# EAGLE board Iridium_9603_Beacon_V3_Paste_Mask_All (EAGLE 7.6.0)
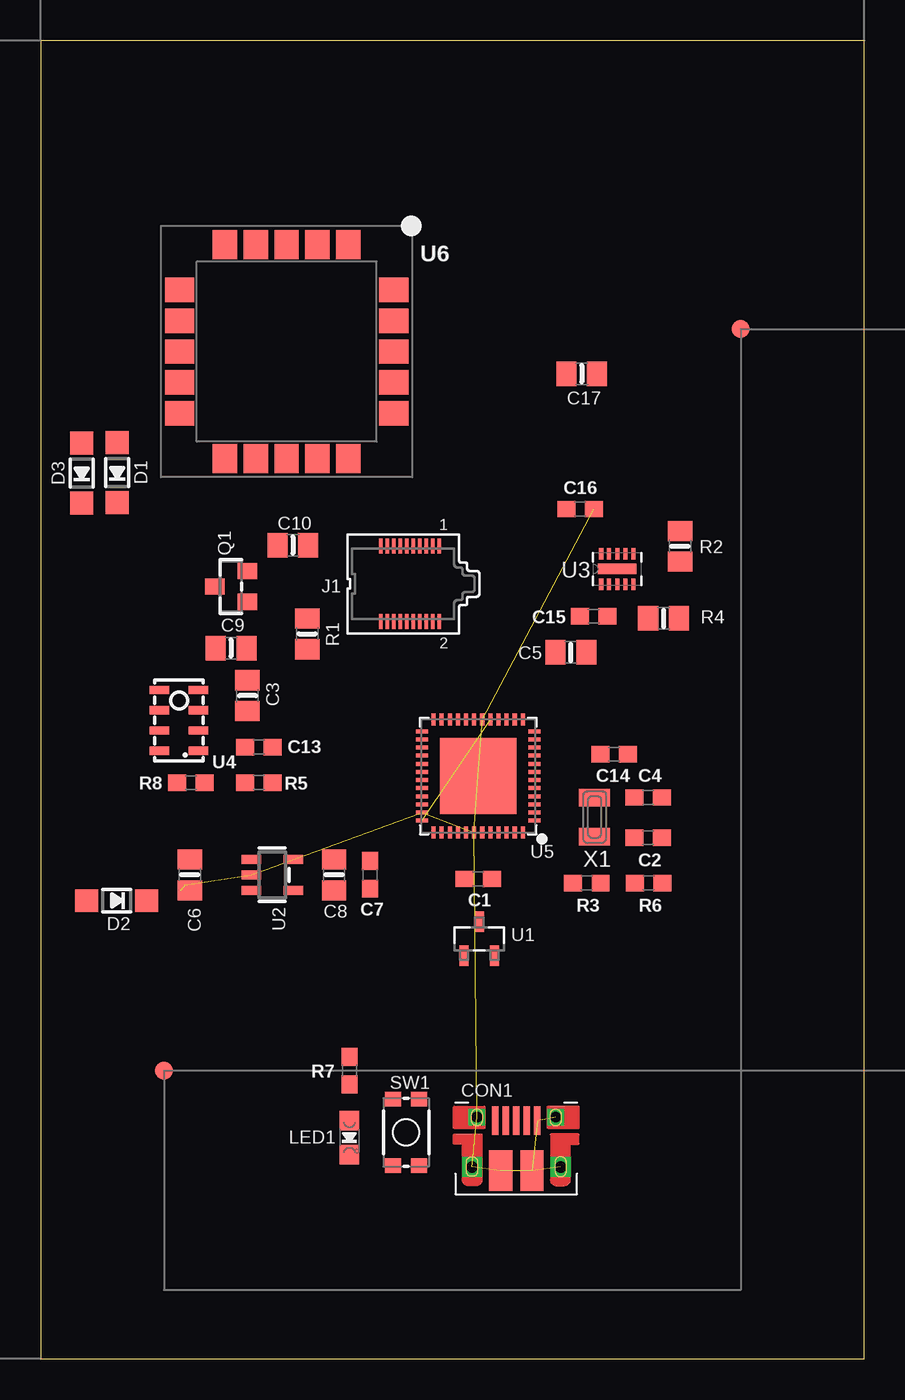
[diagram p0: board, top side]
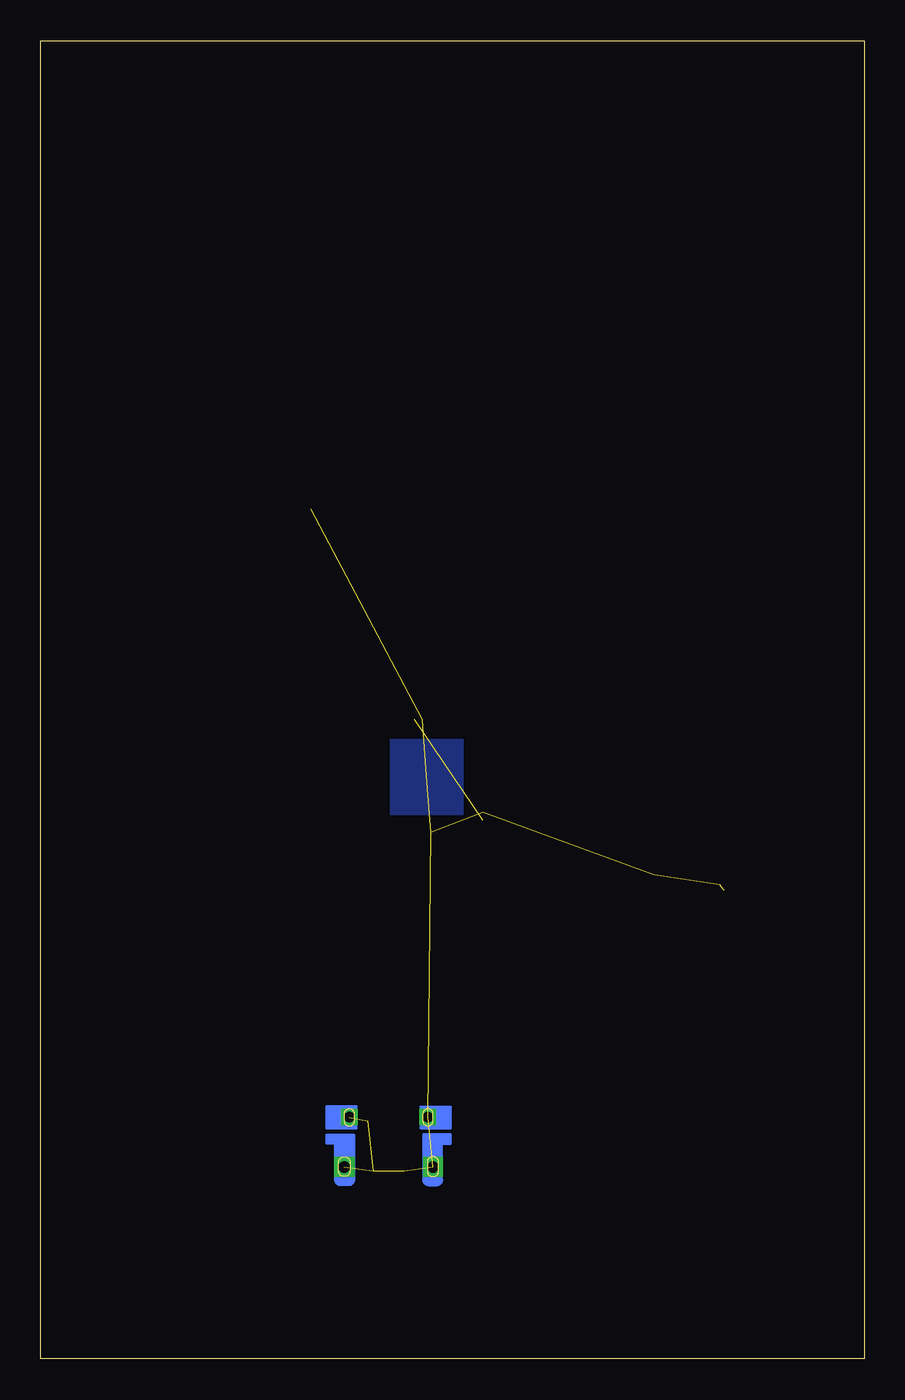
[diagram p1: board, bottom side, seen from below]

Size 50.8 x 81.28 mm. Coordinates in mm from the lower left corner, seen from the top.
Outline: 0,0 50.8,0 50.8,81.28 0,81.28 0,0
Copper layers (1*16): Top 0.018mm / dielectric 1.55mm / Bottom 0.018mm
Design rules "Multi-CB_2L_125um-Tracks_OL35um": minimum track width 0.125mm, minimum drill 0.2mm, track to track 0.125mm, track to pad 0.125mm, pad to pad 0.125mm, via to via 0.125mm, smd to smd 0mil, copper to edge 0.2mm, drill to drill 0.2mm, minimum pad ring 0.125mm, minimum via ring 0.125mm, stop-mask expansion 2mil, vias tented up to drill 0.45mm, thermal gap 0.2mm

## Footprints (pad centres in the part's own frame; a part is rotated, then mirrored left to right if it is on the bottom)
0603-NO = smd 1.1 x 1: 1 -0.85,0; 2 0.85,0
0805-NO = smd 1.24 x 1.5: 1 -0.95,0; 2 0.95,0
FCI_10103594 = smd 1.425 x 2.5: BASE@1 -0.963,1.45; BASE@2 0.963,1.45 | smd 0.4 x 1.75: D+ 0,4.525; D- -0.65,4.525; GND 1.3,4.525; ID 0.65,4.525; VBUS -1.3,4.525 | drill 0.7 pad 1.25 square: SPRT@1 -2.736,1.679; SPRT@2 2.736,1.679 | drill 0.65 pad 1.016 square: SPRT@3 -2.426,4.747; SPRT@4 2.426,4.747
SOD-123 = smd 1.4 x 1.4: A 1.85,0; C -1.85,0
FIDUCIAL-1X2-111% = smd 1.11 x 1.11: 1 0,0
SS4-10-3.50-X-D = smd 0.23 x 0.93: 1 1.8,2.335; 2 1.8,-2.335; 3 1.4,2.335; 4 1.4,-2.335; 5 1,2.335; 6 1,-2.335; 7 0.6,2.335; 8 0.6,-2.335; 9 0.2,2.335; 10 0.2,-2.335; 11 -0.2,2.335; 12 -0.2,-2.335; 13 -0.6,2.335; 14 -0.6,-2.335; 15 -1,2.335; 16 -1,-2.335; 17 -1.4,2.335; 18 -1.4,-2.335; 19 -1.8,2.335; 20 -1.8,-2.335
CHIPLED_0805_NOOUTLINE = smd 1.2 x 1.2: A 0,-1.05; C 0,1.05
SOT23-WIDE = smd 1 x 1.2: 1 -0.95,-1; 2 0.95,-1; 3 0,1
TACTILE_SWITCH_SMD_4.6X2.8MM = smd 0.9 x 1: 1 -2.05,-0.8; 2 2.05,-0.8; 3 2.05,0.8; 4 -2.05,0.8
SOT95P237X112-3N = smd 0.559 x 1.27: 1 -0.94,-1.041; 2 0.94,-1.041; 3 0,1.041
SOT23-5 = smd 0.55 x 1.2: 1 -0.95,-1.3; 2 0,-1.3; 3 0.95,-1.3; 4 0.95,1.3; 5 -0.95,1.3
DFN300X200-10L = smd 0.711 x 0.254: 1 -0.94,0.991; 2 -0.94,0.508; 3 -0.94,0; 4 -0.94,-0.508; 5 -0.94,-0.991; 6 0.94,-0.991; 7 0.94,-0.508; 8 0.94,0; 9 0.94,0.508; 10 0.94,0.991 | smd 0.635 x 2.388: 11 0,0
LGA8 = smd 1.2 x 0.5: 1 -1.2,1.875; 2 -1.2,0.625; 3 -1.2,-0.625; 4 -1.2,-1.875; 5 1.2,-1.875; 6 1.2,-0.625; 7 1.2,0.625; 8 1.2,1.875
TQFN48_7MM = smd 0.25 x 0.75: 1 -2.75,-3.475; 2 -2.25,-3.475; 3 -1.75,-3.475; 4 -1.25,-3.475; 5 -0.75,-3.475; 6 -0.25,-3.475; 7 0.25,-3.475; 8 0.75,-3.475; 9 1.25,-3.475; 10 1.75,-3.475; 11 2.25,-3.475; 12 2.75,-3.475; 25 2.75,3.475; 26 2.25,3.475; 27 1.75,3.475; 28 1.25,3.475; 29 0.75,3.475; 30 0.25,3.475; 31 -0.25,3.475; 32 -0.75,3.475; 33 -1.25,3.475; 34 -1.75,3.475; 35 -2.25,3.475; 36 -2.75,3.475 | smd 0.75 x 0.25: 13 3.475,-2.75; 14 3.475,-2.25; 15 3.475,-1.75; 16 3.475,-1.25; 17 3.475,-0.75; 18 3.475,-0.25; 19 3.475,0.25; 20 3.475,0.75; 21 3.475,1.25; 22 3.475,1.75; 23 3.475,2.25; 24 3.475,2.75; 37 -3.475,2.75; 38 -3.475,2.25; 39 -3.475,1.75; 40 -3.475,1.25; 41 -3.475,0.75; 42 -3.475,0.25; 43 -3.475,-0.25; 44 -3.475,-0.75; 45 -3.475,-1.25; 46 -3.475,-1.75; 47 -3.475,-2.25; 48 -3.475,-2.75 | smd 4.7 x 4.7: THERMAL 0,0
SAM-M8Q = smd 1.8 x 1.5: 1 -6.6,3.8; 2 -6.6,1.9; 3 -6.6,0; 4 -6.6,-1.9; 5 -6.6,-3.8; 11 6.6,-3.8; 12 6.6,-1.9; 13 6.6,0; 14 6.6,1.9; 15 6.6,3.8 | smd 1.5 x 1.8: 6 -3.8,-6.6; 7 -1.9,-6.6; 8 0,-6.6; 9 1.9,-6.6; 10 3.8,-6.6; 16 3.8,6.6; 17 1.9,6.6; 18 0,6.6; 19 -1.9,6.6; 20 -3.8,6.6
XTAL3215 = smd 1.1 x 1.9: P$1 1.2,0; P$2 -1.2,0

## Placement (x,y rotation side)
C1  1uF  [0603-NO]  26.99,29.59 180 top
C2  22pF  [0603-NO]  37.47,32.13 0 top
C3  10uF  [0805-NO]  12.76,40.89 270 top
C4  22pF  [0603-NO]  37.47,34.61 0 top
C5  10uF  [0805-NO]  32.7,43.56 180 top
C6  10µF  [0805-NO]  9.21,29.84 270 top
C7  1uF  [0603-NO]  20.32,29.84 270 top
C8  10µF  [0805-NO]  18.1,29.84 270 top
C9  0.1uF  [0805-NO]  11.75,43.81 0 top
C10  10uF  [0805-NO]  15.56,50.16 0 top
C13  0.1uF  [0603-NO]  13.46,37.72 0 top
C14  1uF  [0603-NO]  35.37,37.27 0 top
C15  1uF  [0603-NO]  34.1,45.78 0 top
C16  0.22uF  [0603-NO]  33.27,52.39 0 top
C17  2.2uF  [0805-NO]  33.37,60.74 0 top
CON1  [FCI_10103594]  29.34,10.16 0 top
D1  MBR120  [SOD-123]  4.73,54.64 90 top
D2  MBR120  [SOD-123]  4.7,28.26 180 top
D3  MBR120  [SOD-123]  2.54,54.61 90 top
FD3  FIDUCIAL  [FIDUCIAL-1X2-111%]  7.62,17.78 0 top
FD4  FIDUCIAL  [FIDUCIAL-1X2-111%]  43.18,63.5 0 top
J1  SS4-10-3.50-X-D  [SS4-10-3.50-X-D]  22.78,47.79 0 top
LED1  RED  [CHIPLED_0805_NOOUTLINE]  19.05,13.65 180 top
Q1  DMG3415U-7  [SOT23-WIDE]  11.75,47.62 90 top
R1  100K  [0805-NO]  16.45,44.7 90 top
R2  30K  [0805-NO]  39.43,50.1 90 top
R3  100k  [0603-NO]  33.69,29.34 0 top
R4  100K  [0805-NO]  38.42,45.66 0 top
R5  1K  [0603-NO]  13.46,35.53 0 top
R6  100K  [0603-NO]  37.5,29.34 0 top
R7  2.2K  [0603-NO]  19.05,17.78 270 top
R8  1K  [0603-NO]  9.27,35.53 180 top
SW1  [TACTILE_SWITCH_SMD_4.6X2.8MM]  22.54,13.97 270 top
U1  MCP111T-195I/TT  [SOT95P237X112-3N]  27.05,25.91 0 top
U2  SPX3819-3.3  [SOT23-5]  14.29,29.84 270 top
U3  LTC3225EDDB#TRMPBF  [DFN300X200-10L]  35.56,48.7 90 top
U4  MPL3115A2LGA8  [LGA8]  8.54,39.37 180 top
U5  ATSAMD21G18_QFN  [TQFN48_7MM]  26.99,35.94 90 top
U6  SAM-M8Q  [SAM-M8Q]  15.18,62.1 270 top
X1  32.768  [XTAL3215]  34.16,33.4 270 top

## Library data of the parts
C1-C10 C13-C17 CON1 D1-D3 LED1 Q1 R1-R8 U2 U5 = microbuilder
FD3 FD4 = Iridium_9603_Beacon_V3_Paste_Mask
J1 = SS4-10-3.50-X-D
SW1 = SparkFun-Electromechanical; PROD_ID: SWCH-13065
U1 = Microchip-MCP11; MPN: MCP111T-270E/TT; OC_FARNELL: 1851877; OC_NEWARK: 56J7328; PACKAGE: SOT23-3; SUPPLIER: MICROCHIP
U3 = LTC_By_element14_Batch_1
U4 = SparkFun-Sensors
U6 = ubloxLib
X1 = adafruit2

## Nets
GND: C16.2 CON1.BASE@1 CON1.BASE@2 CON1.GND CON1.SPRT@1 CON1.SPRT@2 CON1.SPRT@3 CON1.SPRT@4 U2.2 U5.18 U5.35 U5.42 U5.THERMAL
GNDA: U5.5
IN: U2.1
N$1: U4.4
VBUS: CON1.VBUS
VDD: U1.3
VDDA: U5.6
VDDCORE: U5.43
VDDIN: U5.44
VDDIO: U5.17 U5.36
VIN: U3.9
VSS: U1.2

## Tracks (layer width: path | path; a pad name or v marks a point on that pad's centre or on a via)
+3V3
  pour Bottom: 24.77,38.16 29.21,38.16 29.21,33.59 24.77,33.59
GND  (15 unrouted)
VDDIO  (1 unrouted)

## Text on the board
tPlace: U6